# EAGLE board schema_puissance (EAGLE 6.5.0)
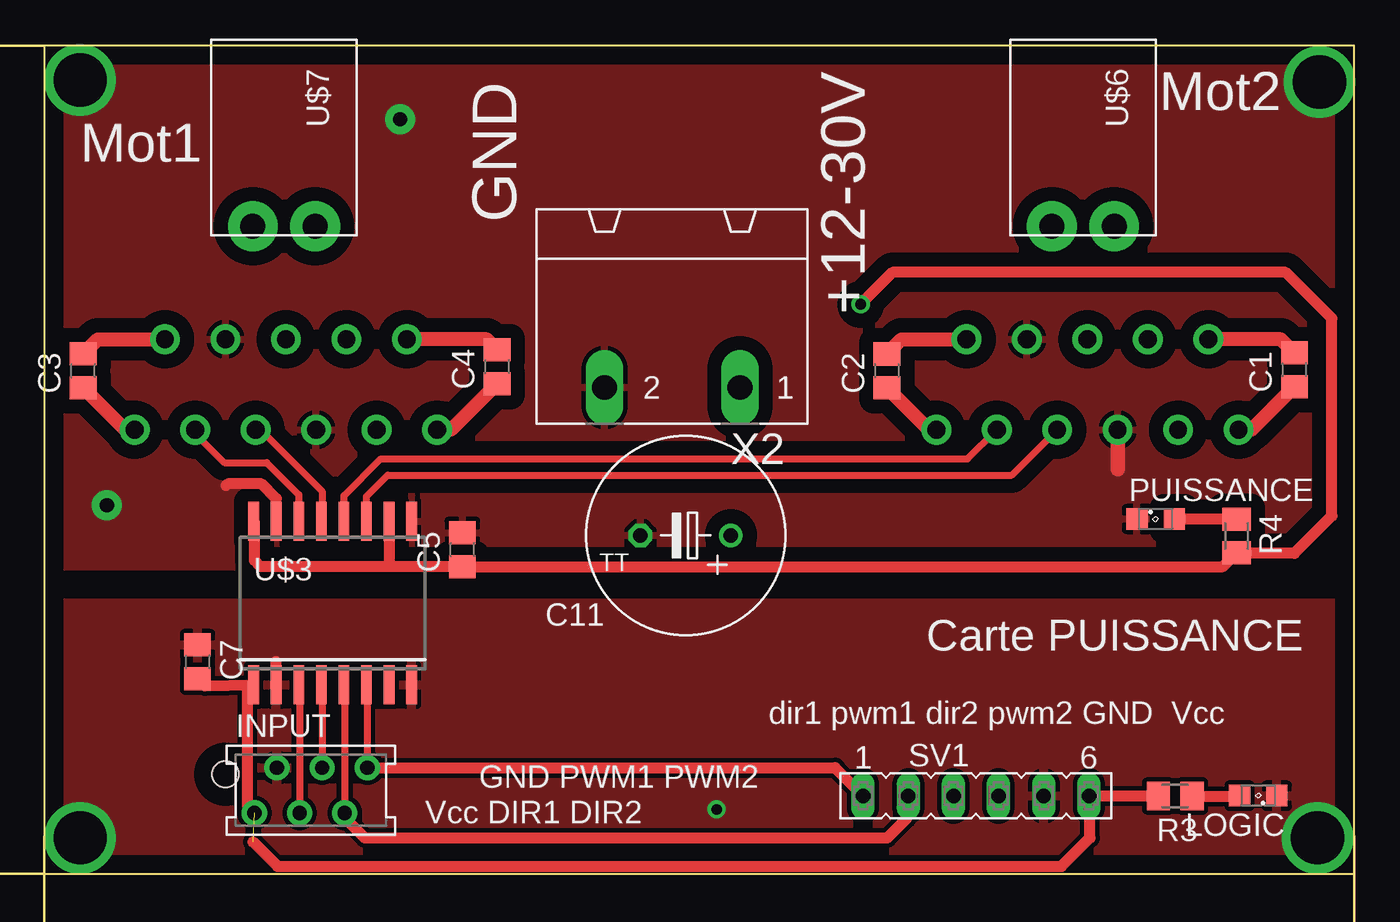
[diagram p0: board, top side]
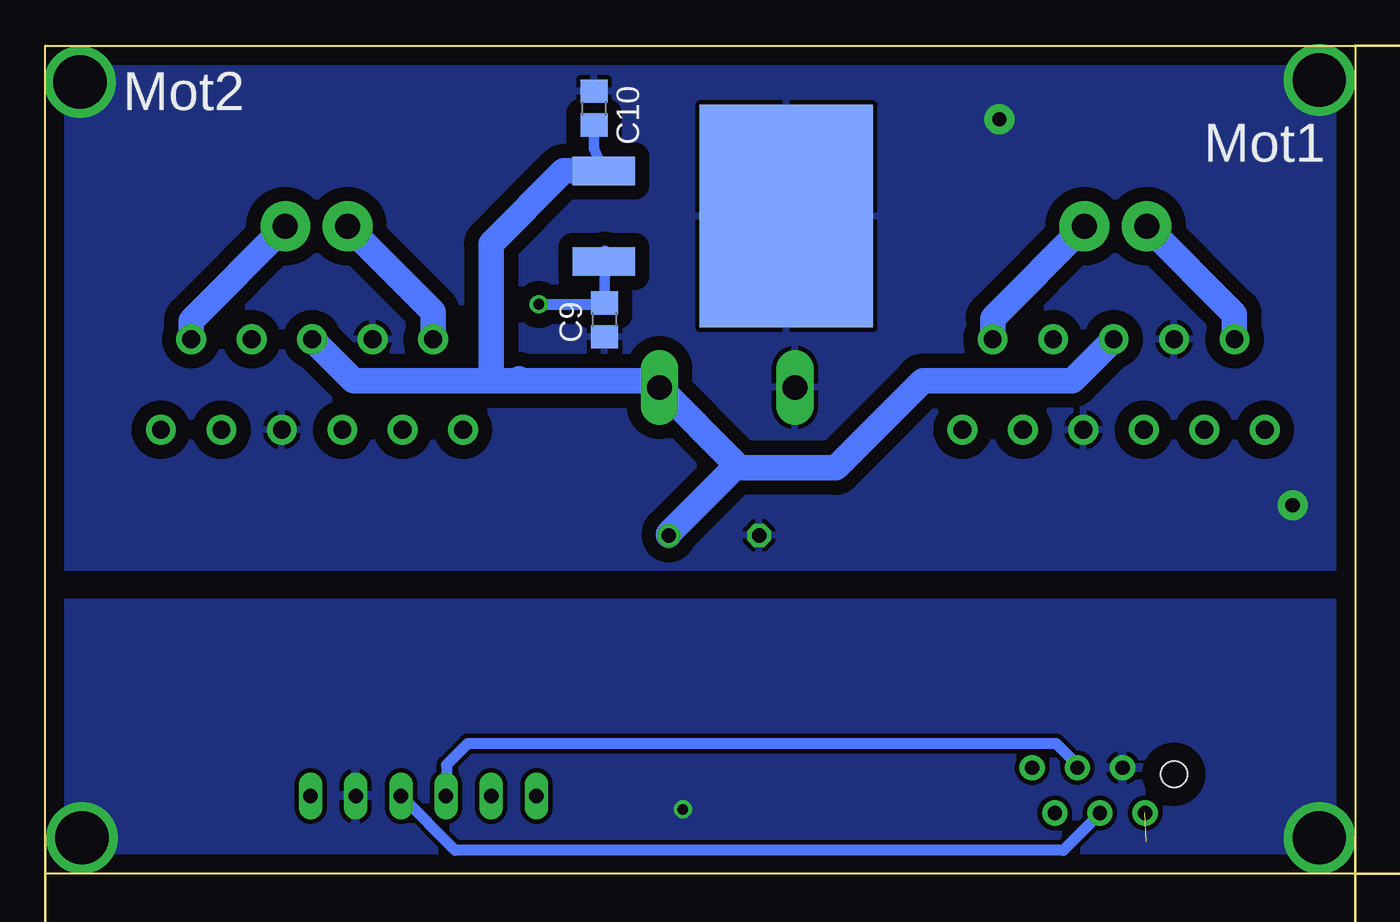
[diagram p1: board, bottom side, seen from below]

Size 73.66 x 46.55 mm. Coordinates in mm from the lower left corner, seen from the top.
Outline: 0,46.55 0,0 73.66,0 73.66,46.55 0,46.55
Copper layers (1*16): Top 0.035mm / dielectric 1.5mm / Bottom 0.035mm
Design rules "default": minimum track width 10mil, minimum drill 24mil, track to track 8mil, track to pad 8mil, pad to pad 8mil, via to via 8mil, smd to smd 8mil, copper to edge 40mil, drill to drill 8mil, minimum pad ring 10mil, minimum via ring 8mil, stop-mask expansion 4mil, vias tented up to drill 0mil, thermal gap 10mil
Milling: area 0,-5.6 to 1.5,-5; area 72.2,-5.6 to 73.7,-5; area 33.4,-4.9 to 40.3,-3.1; area -14.3,0 to -13.7,1.5; area -14.3,45.1 to -13.7,46.6; area -16.1,19.8 to -14.4,26.7; 6 lines

## Footprints (pad centres in the part's own frame; a part is rotated, then mirrored left to right if it is on the bottom)
C0805 = smd 1.3 x 1.5: 1 -0.95,0; 2 0.95,0
TT5D11 = drill 0.813: + -2.54,0 | drill 0.813 octagon: - 2.54,0
AMP-215079-6 = drill 0.8 pad 1.422: 1 0,0; 2 1.27,2.54; 3 2.54,0; 4 3.81,2.54; 5 5.08,0; 6 6.35,2.54 | hole 1.5: -1.62,2.175
SML0805 = smd 1.2 x 1.2: A 1.05,0; C -1.05,0
M0805 = smd 1.3 x 1.6: 1 -0.95,0; 2 0.95,0
FE06 = drill 0.813 long: 1 -6.35,0; 2 -3.81,0; 3 -1.27,0; 4 1.27,0; 5 3.81,0; 6 6.35,0
LMD18200 = drill 1 pad 1.676: 1 0,0; 2 1.7,5.08; 3 3.4,0; 4 5.1,5.08; 5 6.8,0; 6 8.5,5.08; 7 10.2,0; 8 11.9,5.08; 9 13.6,0; 10 15.3,5.08; 11 17,0
SO-16W = smd 0.6 x 2.2: 1 -4.445,-4.6; 2 -3.175,-4.6; 3 -1.905,-4.6; 4 -0.635,-4.6; 5 0.635,-4.6; 6 1.905,-4.6; 7 3.175,-4.6; 8 4.445,-4.6; 9 4.445,4.6; 10 3.175,4.6; 11 1.905,4.6; 12 0.635,4.6; 13 -0.635,4.6; 14 -1.905,4.6; 15 -3.175,4.6; 16 -4.445,4.6
DPAK = smd 12.5 x 9.75: 1 0,0 | smd 1.6 x 3.5: 2 -2.54,-10.275; 3 2.54,-10.275
SL-3.5-2-90G = drill 1.4 pad 2.8: 1 0,-1.75; 2 0,1.75
GMSTBA2 = drill 1.397 long: 1 -3.81,5.08; 2 3.81,5.08

## Placement (x,y rotation side)
C1  10nF  [C0805]  70.31,28.33 90 top
C2  10nF  [C0805]  47.39,28.27 90 top
C3  10nF  [C0805]  2.18,28.27 90 top
C4  10nF  [C0805]  25.46,28.5 90 top
C5  100nF  [C0805]  23.51,18.21 90 top
C7  100nF  [C0805]  8.61,11.91 270 top
C9  100nF  [C0805]  42.21,31.13 90 bottom
C10  330nF  [C0805]  42.81,43.04 270 bottom
C11  2200u  [TT5D11]  36.06,19.01 180 top
INPUT  MMATCH-6-  [AMP-215079-6]  11.81,3.41 0 top
LOGIC  [SML0805]  68.27,4.38 180 top
PUISSANCE  [SML0805]  62.5,19.94 0 top
R3  1k  [M0805]  63.6,4.36 180 top
R4  1k  [M0805]  67.06,18.98 270 top
SV1  [FE06]  52.4,4.37 0 top
U$1  LMD18200  [LMD18200]  5.08,24.96 0 top
U$2  LMD18200  [LMD18200]  50.16,24.96 0 top
U$3  ADUM1400S  [SO-16W]  16.21,15.21 0 top
U$5  L7805TO263  [DPAK]  31.98,36.97 270 bottom
U$6  SL-3.5-2-90G  [SL-3.5-2-90G]  58.42,36.39 270 top
U$7  SL-3.5-2-90G  [SL-3.5-2-90G]  13.47,36.39 270 top
X2  GMSTBA2  [GMSTBA2]  35.31,32.41 180 top

## Library data of the parts
C1-C5 C7 C9-C11 R3 R4 = rcl
INPUT = jt-con-micromatch
LOGIC PUISSANCE = led
SV1 = con-lsta; OC_FARNELL: unknown; OC_NEWARK: unknown
U$1 U$2 = texas
U$3 = analog-devices
U$5 = st-microelectronics
U$6 U$7 = WEIDMULLER
X2 = con-phoenix-762; MF: FARNELL; MPN: 1757242; OC_FARNELL: 3705171; OC_NEWARK: 71C4161

## Nets
+5V: C5.1 C9.2 R4.2 U$3.10 U$3.16 U$5.3
+12V: C10.2 C11.+ U$1.6 U$2.6 U$5.2 X2.1
C_DIR1: INPUT.3 SV1.4 U$3.3
C_DIR2: INPUT.5 SV1.2 U$3.5
C_PWM1: INPUT.4 SV1.3 U$3.4
C_PWM2: INPUT.6 SV1.1 U$3.6
DIR1: U$1.3 U$3.14
DIR2: U$2.3 U$3.12
GND: C7.1 INPUT.2 LOGIC.C SV1.5 U$3.2 U$3.8
GNDA: C5.2 C9.1 C10.1 C11.- PUISSANCE.C U$1.4 U$1.7 U$2.4 U$2.7 U$3.9 U$3.15 U$5.1 X2.2
N$1: C1.1 U$2.11
N$2: PUISSANCE.A R4.1
N$3: C2.1 U$2.1
N$4: LOGIC.A R3.1
N$5: C3.1 U$1.1
N$7: C4.1 U$1.11
POLE_1_MOT1: C3.2 U$1.2 U$7.1
POLE_1_MOT2: C2.2 U$2.2 U$6.1
POLE_2_MOT1: C4.2 U$1.10 U$7.2
POLE_2_MOT2: C1.2 U$2.10 U$6.2
PWM1: U$1.5 U$3.13
PWM2: U$2.5 U$3.11
TF1: U$1.9
TF2: U$2.9
VCC: C7.2 INPUT.1 R3.2 SV1.6 U$3.1

## Tracks (layer width: path | path; a pad name or v marks a point on that pad's centre or on a via)
+5V  (via drill 0.6 pad 1.02)
  Top 0.61: v45.91,32.01 47.71,33.81 69.81,33.81 72.41,31.21 72.41,20.11 70.31,18.01 67.08,18.01 R4.2 66.29,17.26 C5.1 19.51,17.26 | 19.51,17.26 12.16,17.26 11.81,17.61 11.81,19.77 U$3.16 | U$3.10 19.38,17.39 19.51,17.26
  Bottom 0.6: C9.2 42.18,35.01 U$5.3
  Bottom 0.61: v45.91,32.01 42.28,32.01 C9.2
+12V
  Bottom 0.6: C10.2 42.81,40.76 U$5.2
  Bottom 1.422: U$1.6 15.91,27.71 24.31,27.71 29.21,22.81 34.6,22.81 34.76,22.96 | U$2.6 56.33,27.71 48.51,27.71 | 48.51,27.71 47.11,27.71 | 47.11,27.71 39.5,27.71 X2.1 34.76,22.96 | C11.+ 38.6,19.12 34.76,22.96 | 47.01,27.81 47.11,27.71 | U$5.2 44.52,39.51 48.61,35.41 48.61,27.81 48.51,27.71
C_DIR1
  Top 0.406: U$3.3 14.35,10.61 INPUT.3
  Bottom 0.61: INPUT.3 14.35,3.37 16.41,1.31 50.61,1.31 SV1.4
C_DIR2
  Top 0.406: U$3.5 16.89,10.61 INPUT.5
  Top 0.61: INPUT.5 16.89,3.13 18.01,2.01 47.41,2.01 48.51,3.11 48.51,4.29 SV1.2
C_PWM1
  Top 0.406: U$3.4 15.62,10.61 INPUT.4
  Bottom 0.61: INPUT.4 15.62,6.12 16.81,7.31 49.91,7.31 51.11,6.11 51.11,4.39 SV1.3
C_PWM2
  Top 0.406: U$3.6 18.16,10.61 INPUT.6
  Top 0.61: INPUT.6 44.47,5.95 SV1.1
DIR1
  Top 0.406: U$1.3 8.48,24.74 10.11,23.11 12.51,23.11 14.31,21.31 U$3.14
DIR2
  Top 0.406: U$3.12 16.84,21.25 18.91,23.31 51.91,23.31 U$2.3
GND  (via drill 0.6 pad 1.02, 3 pad 1.42)
  Top 0.61: 13.01,11.91 13.01,10.64 U$3.2
  other vias: 37.81,3.61 71.61,2.01 2.01,2.01
  pour Bottom (isolate 0.254): 0.01,-0.09 0.11,15.21 73.61,15.21 73.51,-0.09
  pour Top (isolate 0.254): 0.11,15.21 0.11,-0.09 73.61,-0.09 73.61,15.21
GNDA  (via drill 0.8 pad 1.68, 3 pad 1.42)
  Top 0.61: U$3.15 13.04,21.09 12.21,21.91 10.31,21.91 10.21,21.81
  Top 0.813: U$2.7 60.36,22.75
  other vias: 3.51,20.71 20.01,42.41 2.01,44.61 71.71,44.51
  pour Bottom (isolate 0.8): 0.11,17.21 0.11,46.21 73.61,46.21 73.61,17.21
  pour Top (isolate 0.8): 0.11,17.21 0.11,46.21 73.61,46.21 73.61,17.21
N$1
  Top 0.8: C1.1 67.89,24.96 U$2.11
N$2
  Top 0.61: R4.1 PUISSANCE.A
N$3
  Top 0.8: C2.1 49.74,24.96 U$2.1
N$4
  Top 0.61: R3.1 67,4.36 LOGIC.A
N$5
  Top 0.8: C3.1 4.54,24.96 U$1.1
N$7
  Top 0.8: C4.1 22.87,24.96 U$1.11
POLE_1_MOT1
  Top 0.8: C3.2 3,30.04 U$1.2
  Bottom 1.422: U$7.1 6.78,31.45 U$1.2
POLE_1_MOT2
  Top 0.8: C2.2 48.21,30.04 U$2.2
  Bottom 1.422: U$6.1 51.87,31.59 U$2.2
POLE_2_MOT1
  Top 0.8: C4.2 24.87,30.04 U$1.10
  Bottom 1.422: U$7.2 20.38,31.23 U$1.10
POLE_2_MOT2
  Top 0.8: C1.2 69.55,30.04 U$2.10
  Bottom 1.422: U$6.2 65.47,31.09 U$2.10
PWM1
  Top 0.406: U$1.5 12.16,24.96 15.61,21.51 15.61,19.85 U$3.13
PWM2
  Top 0.406: U$3.11 18.11,21.21 19.31,22.41 54.41,22.41 U$2.5
VCC  (1 unrouted)
  Top 0.61: C7.2 9.02,10.56 U$3.1 11.41,10.26 11.41,3.81 INPUT.1 | 11.73,1.78 13.11,0.41 57.21,0.41 58.81,2.01 58.81,4.31 SV1.6 R3.2

## Text on the board
tNames: +12-30V | GND | Mot2 | Mot1 | Carte PUISSANCE | dir1 pwm1 dir2 pwm2 GND Vcc | GND PWM1 PWM2 / Vcc DIR1 DIR2
bNames: Mot2 | Mot1